# EAGLE board bolt (EAGLE 9.6.2)
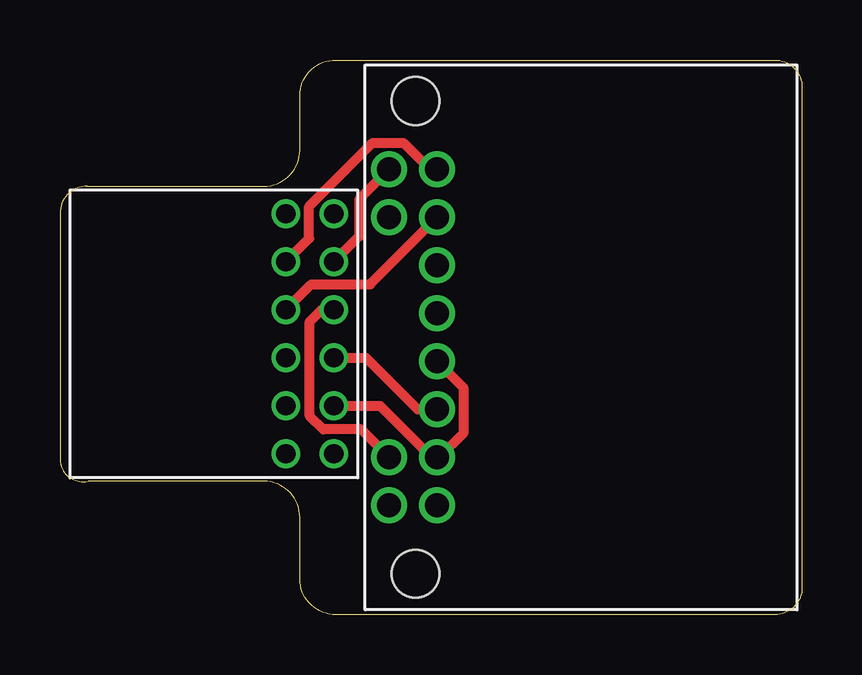
[diagram p0: board, top side]
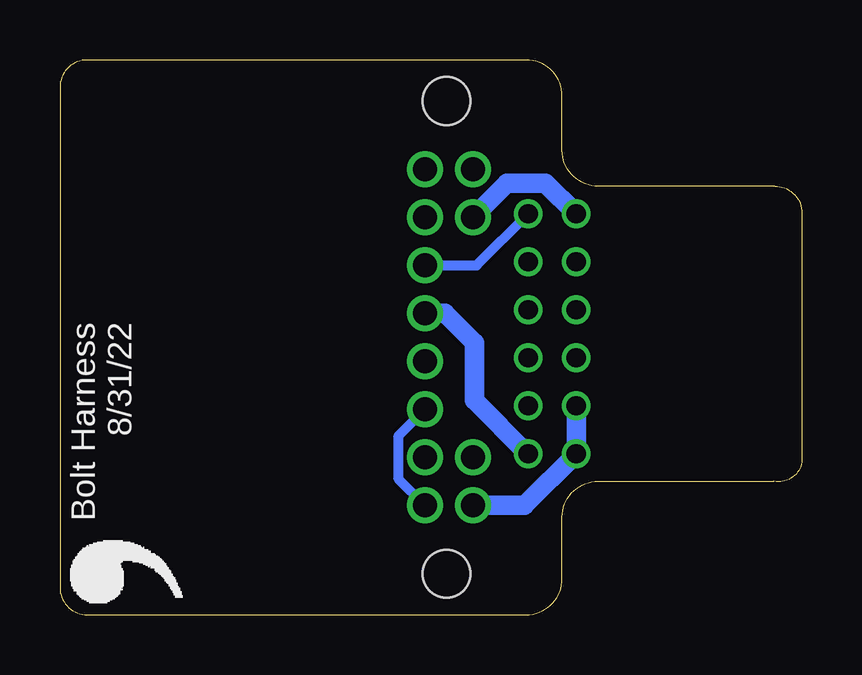
[diagram p1: board, bottom side, seen from below]

Size 30.94 x 23.11 mm. Coordinates in mm from the lower left corner, seen from the top.
Outline: 29.81,0 11.5,0 arc-90 10,1.5 10,4.06 arc90 8.5,5.56 1.17,5.56 arc-90 0,6.35 0,16.74 arc-90 1.14,17.86 8.5,17.86 arc90 10,19.36 10,21.61 arc-90 11.5,23.11 29.81,23.11 arc-90 30.94,21.98 30.94,1.13 arc-90 29.81,0
Copper layers (1*16): Top 0.035mm / dielectric 1.5mm / Bottom 0.035mm
Design rules "jlcpcb_2layer": minimum track width 5mil, minimum drill 12mil, track to track 5mil, track to pad 5mil, pad to pad 5mil, via to via 5mil, smd to smd 5mil, copper to edge 8mil, drill to drill 8mil, minimum pad ring 3mil, minimum via ring 3mil, stop-mask expansion 4mm, vias tented up to drill 20mil, thermal gap 10mil

## Footprints (pad centres in the part's own frame; a part is rotated, then mirrored left to right if it is on the bottom)
0348260124 = drill 1: P1 -7,2; P2 -5,2; P3 5,2; P4 7,2; P5 -7,0; P6 -5,0; P7 -3,0; P8 -1,0; P9 1,0; P10 3,0; P11 5,0; P12 7,0 | hole 2: -9.85,0.9; 9.85,0.9
5018761240 = drill 0.8: P1 5,-1; P2 5,1; P3 3,-1; P4 3,1; P5 1,-1; P6 1,1; P7 -1,-1; P8 -1,1; P9 -3,-1; P10 -3,1; P11 -5,-1; P12 -5,1

## Placement (x,y rotation side)
FRAME1  FRAME-LETTER-OPENNO_PACKAGE  [DUMMY]  -0.61,-1.85 0 top
J1  0348260124  [0348260124]  15.72,11.56 90 top
J2  5018761240  [5018761240]  10.41,11.71 270 top
U$1  [LOGO]  25.53,-0.18 90 bottom

## Library data of the parts
FRAME1 = comma.ai; DESIGNER: Nobody; VERSION: v01
J1 = 0348240124; CPN: CAI-HARNESS-MOLEX-0348260124; MPN: 0348260124
J2 = 5018761440; CPN: CAI-HARNESS-MOLEX-5018761240; MPN: 5018761240
U$1 = comma.ai

## Nets
12VIN: J1.P3 J2.P11
CAN0_H: J1.P5 J1.P7 J2.P6
CAN0_L: J1.P6 J1.P8 J2.P4
CAN1_H: J2.P5
GND: J1.P1 J2.P1 J2.P3
IGN: J1.P9 J2.P2
PT1: J1.P2 J2.P8
PT2: J1.P4 J2.P10
PT3: J1.P10 J2.P12
PT4: J1.P11 J2.P7
PT5: J1.P12 J2.P9

## Tracks (layer width: path | path; a pad name or v marks a point on that pad's centre or on a via)
12VIN
  Bottom 0.813: J2.P11 10.69,17.98 12.3,17.98 J1.P3
CAN0_H
  Top 0.406: J2.P6 12.76,10.71 14.91,8.56 J1.P7
  Bottom 0.406: J1.P5 16.82,5.65 16.82,7.46 J1.P7
CAN0_L
  Top 0.254: 15.8,6.56 J1.P6
  Top 0.406: J1.P8 16.82,9.46 16.82,7.57 15.8,6.56 | J2.P4 13.34,8.71 15.49,6.56 J1.P6
GND
  Bottom 0.813: J1.P1 11.56,4.56 J2.P1 J2.P3
IGN
  Bottom 0.813: J2.P2 11.44,6.71 13.66,8.93 13.66,11.34 14.88,12.56 J1.P9
PT1
  Top 0.406: J1.P2 12.56,7.72 10.97,7.72 10.41,8.28 10.41,12.21 10.91,12.71 J2.P8
PT2
  Top 0.406: J2.P10 12.5,15.79 12.5,17.33 J1.P4
PT3
  Bottom 0.406: J1.P10 13.56,14.56 J2.P12
PT4
  Top 0.406: J2.P7 10.47,13.77 12.93,13.77 J1.P11
PT5
  Top 0.305: 15.42,18.56 J1.P12
  Top 0.406: J2.P9 10.39,15.68 10.39,17.02 13.04,19.66 14.32,19.66 15.42,18.56

## Text on the board
bPlace: Bolt Harness / 8/31/22